# Altium PCB 超声波.PCBDOC
Units mil, origin at the board's own origin, x right, y up, seen from the top; angles counter-clockwise.
Board outline 6000 x 4000 mil, 2 copper layers (Top Layer, Bottom Layer); 22 components, 20 nets, 72 pads, 7 vias.
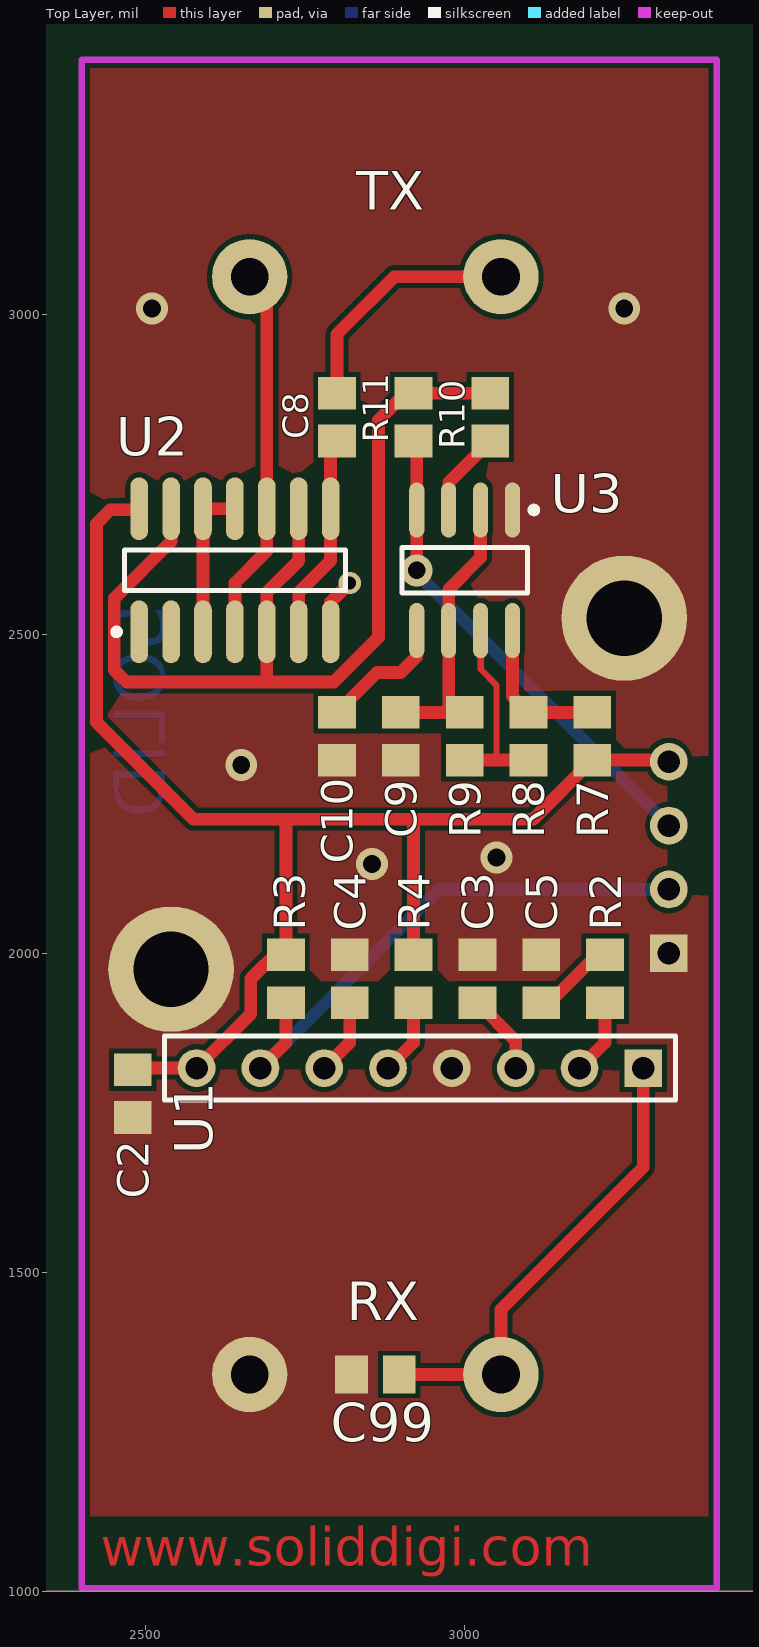
[diagram p0: Top Layer view]
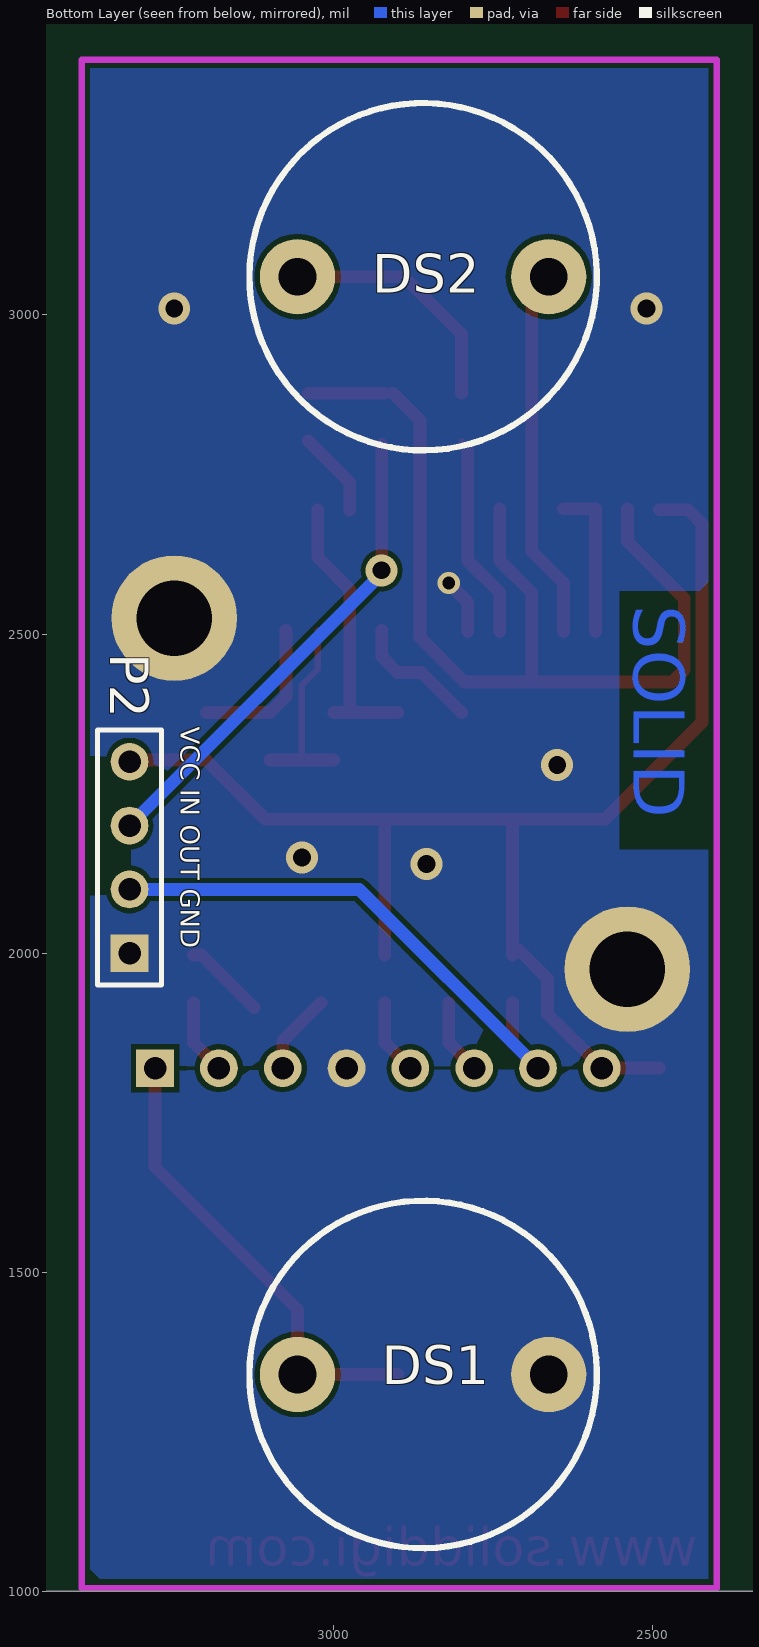
[diagram p1: Bottom Layer view, seen from below]

## Layer stack, top to bottom
Top Layer: signal copper 1.4
Dielectric: dielectric 12.6, FR-4, Dk 4.8
Bottom Layer: signal copper 1.4

## Board outline
1000,1000 7000,1000 7000,5000 1000,5000

## Design rules (kind name [scope] priority, off if disabled: settings)
Clearance [All] p1: gap=8
ComponentClearance [All] p1: gap=10 collisioncheckmode=3 verticalgap=10
HoleSize [All] p1: absolutevalues=TRUE maxlimit=500 minlimit=1 maxpercent=80.000 minpercent=20.000
PlaneConnect [All] p1: planeconnectstyle=Direct reliefexpansion=20 reliefentries=4 reliefconductorwidth=10 reliefairgap=10
PolygonConnect [All] p1: connectstyle=Direct reliefconductorwidth=10 reliefentries=4 polygonreliefangle="45 Angle"
RoutingVias [All] p1: holewidth=28 width=50 viastyle="Through Hole" minholewidth=28 minwidth=50 maxholewidth=28 maxwidth=50
SolderMaskExpansion [All] p1: expansion=4
TestPointUsage [All] p1: valid=0 allowmultiple=FALSE
Testpoint [All] p1: side=15 testpointundercomponent=TRUE minsize=40 maxsize=100 preferedsize=60 minholesize=0 maxholesize=40 preferedholesize=32 testpointgrid=1 style=1023 order=0-112345678
Width [All] p1: maxlimit=100 minlimit=10 preferedwidth=20
16 further rules are at their usual default settings.

## Components (designator, comment, footprint, x,y, rotation, side; value= is the part's Value field where it differs from the comment)
C2 "Cap" 6-0805 2480,1780 r270 top
C3 "" 6-0805 3020,1960 r90 top
C4 "Cap" 6-0805 2820,1960 r90 top
C5 "Cap" 6-0805 3120,1960 r90 top
C8 "Cap" 6-0805 2800,2840 r90 top
C9 "Cap" 6-0805 2900,2340 r90 top
C10 "Cap" 6-0805 2800,2340 r90 top
C99 "" 6-0805 2860,1340 r180 top
DS1 "Lamp" 2pin_10mm 2860,1340 r180 bottom
DS2 "Lamp" 2pin_10mm 2860,3060 r180 bottom
P2 "1:GND 2:OUT 3:INPUT 4:VCC" HDR1X4 3320,2000 r90 bottom
R2 "" 2012[0805] 3220,1960 r90 top
R3 "" 2012[0805] 2720,1960 r270 top
R4 "" 2012[0805] 2920,1960 r270 top
R7 "Res1" 6-0805 3200,2340 r90 top
R8 "Res1" 6-0805 3100,2340 r270 top
R9 "Res1" 6-0805 3000,2340 r270 top
R10 "Res1" 6-0805 3040,2840 r270 top
R11 "Res1" 6-0805 2920,2840 r270 top
U1 "CX20106" HDR1X8 3280,1820 r180 top
U2 "CD4069" SOP-14 2640,2600 r0 top
U3 "NE555D" SO8_N 3000,2600 r270 top

## Footprints (in the part's own frame and the unit in brackets; to place one, negate y for a bottom-side part, rotate by r counter-clockwise, add the part's x,y. Pads: shape width x height; smd on the part's side, far side on the other; paste and mask are expansions set on the pad)
2pin_10mm [mm]
  round 3 hole 1.5: 1(-5,0) 2(5,0)
  silkscreen extent -6.91,-6.91 6.91,6.91
6-0805 [mm] "Chip Resistor; Body 2.0 x 1.3 mm (LxW typ)"
  rect 1.3x1.5 smd: 1(-0.95,0) 2(0.95,0)
2012[0805] [mm] "Chip Resistor; Body 2.0 x 1.3 mm (LxW typ)"
  rect 1.3x1.5 smd: 1(-0.95,0) 2(0.95,0)
HDR1X4 [mm] "Connector; Header; 4 Position"
  rect 1.5x1.5 hole 0.9: 1(0,0)
  round 1.5 hole 0.9: 2(2.54,0) 3(5.08,0) 4(7.62,0)
  silkscreen extent -1.27,-1.27 8.89,1.27
HDR1X8 [mm] "Connector; Header; 8 Position"
  rect 1.5x1.5 hole 0.9: 1(0,0)
  round 1.5 hole 0.9: 2(2.54,0) 3(5.08,0) 4(7.62,0) 5(10.16,0) 6(12.7,0) 7(15.24,0) 8(17.78,0)
  silkscreen extent -1.27,-1.27 19.05,1.27
SO8_N [mm] "SOIC, 8-Leads, Body 4.9x3.9mm, Pitch 1.27mm, IPC Medium Density"
  oval 2.2x0.6 smd: 1(-2.4,1.905) 2(-2.4,0.635) 3(-2.4,-0.635) 4(-2.4,-1.905) 5(2.4,-1.905) 6(2.4,-0.635) 7(2.4,0.635) 8(2.4,1.905)
  silkscreen extent -2.52,-2.5 0.9,2.88, body extent -1.95,-2.45 1.95,2.45, height 1.75
SOP-14 [mm]
  oval 0.7x2.5 smd: 1(-3.81,-2.45) 2(-2.54,-2.45) 3(-1.27,-2.45) 4(0,-2.45) 5(1.27,-2.45) 6(2.54,-2.45) 7(3.81,-2.45) 8(3.81,2.45) 9(2.54,2.45) 10(1.27,2.45) 11(0,2.45) 12(-1.27,2.45) 13(-2.54,2.45) 14(-3.81,2.45)
  silkscreen extent -4.83,-2.57 4.4,0.8

## Part data
C2 C4 C5 C8 C9 C10: "Capacitor"
C3 C99: library part Cap, "Capacitor"
DS1 DS2: "Incandescent Bulb"
P2: library part "Header 4", "Header, 4-Pin"
R2 R3 R4: library part Res1, "Resistor"
R7 R8 R9 R10 R11: "Resistor"
U3: "General-Purpose Single Bipolar Timer"

## Free pads (board coordinates)
  round 196.85 hole 118.11: 3(2540,1975) 3(3250,2525)

## Via types
v1: diameter 50, hole 28, Top Layer to Bottom Layer, 6 vias
v2: diameter 35, hole 20, Top Layer to Bottom Layer, 1 vias

## Nets (pads, with @x,y where several pads share a name; then routed paths per layer and width w, separated by ;. In a path a pad name is that pad's centre, name@x,y a point inside that pad or via, vN(x,y) a via of type N, cw(c..) or ccw(c..) an arc to the next point about the centre after c; other vN are vias at no path point)
GND: C2.2 C3.2 C4.2 C5.2 C9.1 C10.1 C99.2 DS1.2 P2.1 pad.3 U1.4 U2.7 U3.1 | length 88.9
  Top Layer w20: U2.7 2790,2550 v2(2820,2580)
  other v1: 2855,2140 3050,2150 2650,2295 2510,3010 3250,3010
INPUT: P2.3 R11.2 U3.4 | length 761.2
  Top Layer w20: v1(2925,2600) R11.2@2925,2797.6
  Bottom Layer w20: v1(2925,2600) 2925,2595 P2.3
NetC3_1: C3.1 U1.3 | length 127.5
  Top Layer w20: C3.1 3080,1862.6 U1.3
NetC4_1: C4.1 U1.6 | length 119.2
  Top Layer w20: U1.6 2820,1860 C4.1
NetC5_1: C5.1 R2.2 | length 129.1
  Top Layer w20: C5.1@3125,1915 3207.4,1997.4 R2.2
NetC8_2: C8.2 DS2.1 | length 386.7
  Top Layer w20: C8.2 2800,2970 2890,3060 DS2.1
NetC9_2: C9.2 R9.1 U3.2 U3.6 | length 437.8
  Top Layer w20: C9.2 R9.1 ; R9.1@2975,2377.4 2975,2570 3025,2620 U3.2
NetC10_2: C10.2 U3.5 | length 201.8
  Top Layer w20: C10.2 2862.6,2440 2900,2440 2925,2465 U3.5
NetC99_1: C99.1 DS1.1 U1.1 | length 727.4
  Top Layer w20: C99.1@2900,1340 DS1.1@3055,1340 ; DS1.1 3056.85,1441.85 3280,1665 U1.1
NetR2_1: R2.1 U1.2 | length 119.2
  Top Layer w20: U1.2 3220,1860 R2.1
NetR4_2: R4.2 U1.5 | length 119.2
  Top Layer w20: U1.5 2920,1860 R4.2
NetR7_2: R7.2 R8.1 U3.8 | length 238.5
  Top Layer w20: U3.8 3075,2402.4 R8.1 R7.2
NetR8_2: R8.2 R9.2 U3.7 | length 313.3
  Top Layer w10: U3.7 3025,2445 3050,2420 3050,2302.6
  Top Layer w20: R9.2 R8.2
NetR10_2: R10.2 U3.3 | length 135
  Top Layer w20: U3.3 2975,2737.6 R10.2
OUT: P2.2 R3.2 U1.7 | length 875.1
  Top Layer w20: U1.7 2720,1860 R3.2
  Bottom Layer w20: U1.7 2960,2100 P2.2
TX: R10.1 R11.1 U2.5 U2.9 U2.13 | length 1559.9
  Top Layer w10: R11.1@2907.4,2877.4 R11.1
  Top Layer w20: U2.13 2540,2645 2451,2556 2451,2444 2470,2425 2795,2425 2865,2495 2865,2835 R11.1@2907.4,2877.4 ; 2690,2430 2690,2565 2740,2615 U2.9 ; R11.1 R10.1
TX_1: C8.1 U2.6 U2.8 | length 323.9
  Top Layer w10: C8.1@2790,2792.6 C8.1
  Top Layer w20: U2.6 2740,2565 2790,2615 C8.1@2790,2792.6
TX_2: DS2.2 U2.4 U2.10 | length 588.3
  Top Layer w20: U2.4 2640,2580 2690,2630 2690,3033.15 DS2.2
TX_N: U2.3 U2.11 U2.12 | length 242.9
  Top Layer w20: U2.3 U2.12 U2.11
VCC: C2.1 P2.4 R3.1 R4.1 R7.1 U1.8 U2.14 | length 2136.9
  Top Layer w20: C2.1@2490,1820 U1.8 2665,1905 2665,1960 R3.1@2710,2005 ; U2.14@2490,2695 2445,2695 2423,2673 2423,2362 2575,2210 3107.4,2210 R7.1 P2.4@3317.4,2302.6 ; R3.1 2720,2210 ; R4.1 2920,2210
pads on no net: U2.1 U2.2

## Polygon pours and split planes (outlines as drawn)
GND on Top Layer "Top Layer-No Net" (solid, remove dead copper, pour order 1000): 2396.75,3407.58 3391.75,3407.58 3391.75,1012.58 2396.75,1012.58 2396.75,3407.58
GND on Bottom Layer "Top Layer-No Net" (solid, remove dead copper, pour order 1001): 2371.56,3424.79 3401.56,3424.79 3401.56,1024.79 3381.56,1004.79 3366.56,1019.79 2396.56,1019.79 2396.56,3404.79 2406.56,3414.79

## Keep-outs
Keep-Out Layer:
  lines w10: 2400,1005 2400,1670 2400,3120 2400,3400 3395,3400 3395,1005 2400,1005

## Other copper
Top Layer:
  text "www.soliddigi.com" at 2430,1040 h60
Bottom Layer:
  text "SOLID" at 2530,2545 h80 r90

## Silkscreen, mask and mechanical layers (free items; w line width, h text height)
Top Overlay:
  text "TX" at 2830,3165 h60
  text "RX" at 2815,1425 h60
Bottom Overlay:
  text "VCC IN OUT GND" at 3240,2355 h30 r90
Top Solder:
  text "www.soliddigi.com" at 2430,1040 h60
Bottom Solder:
  text "SOLID" at 2530,2545 h80 r90